# Altium PCB 48V_Converter.PcbDoc
Units mil, origin at the board's own origin, x right, y up, seen from the top; angles counter-clockwise.
Board outline 6000 x 4000 mil, 4 copper layers (Top Layer, Signal Layer 1, Signal Layer 2, Bottom Layer), stack 30.634 mil thick; 15 components, 14 nets, 64 pads, 9 vias.
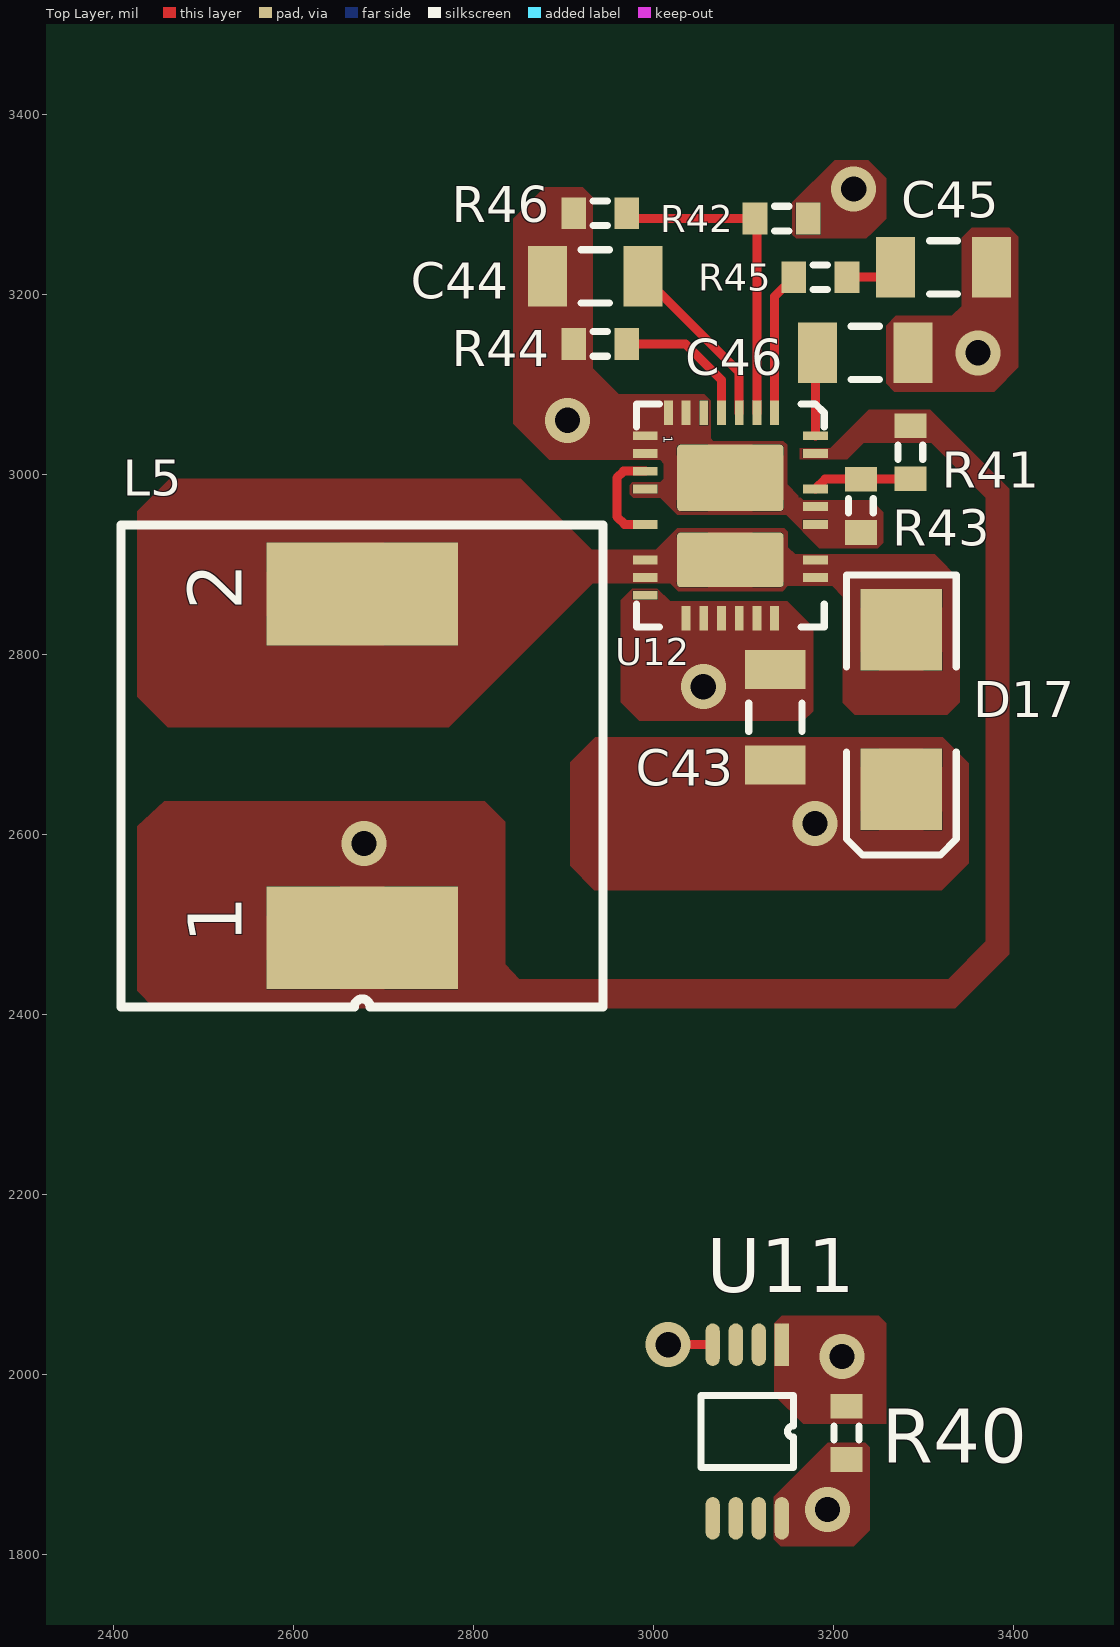
[diagram p0: Top Layer view]
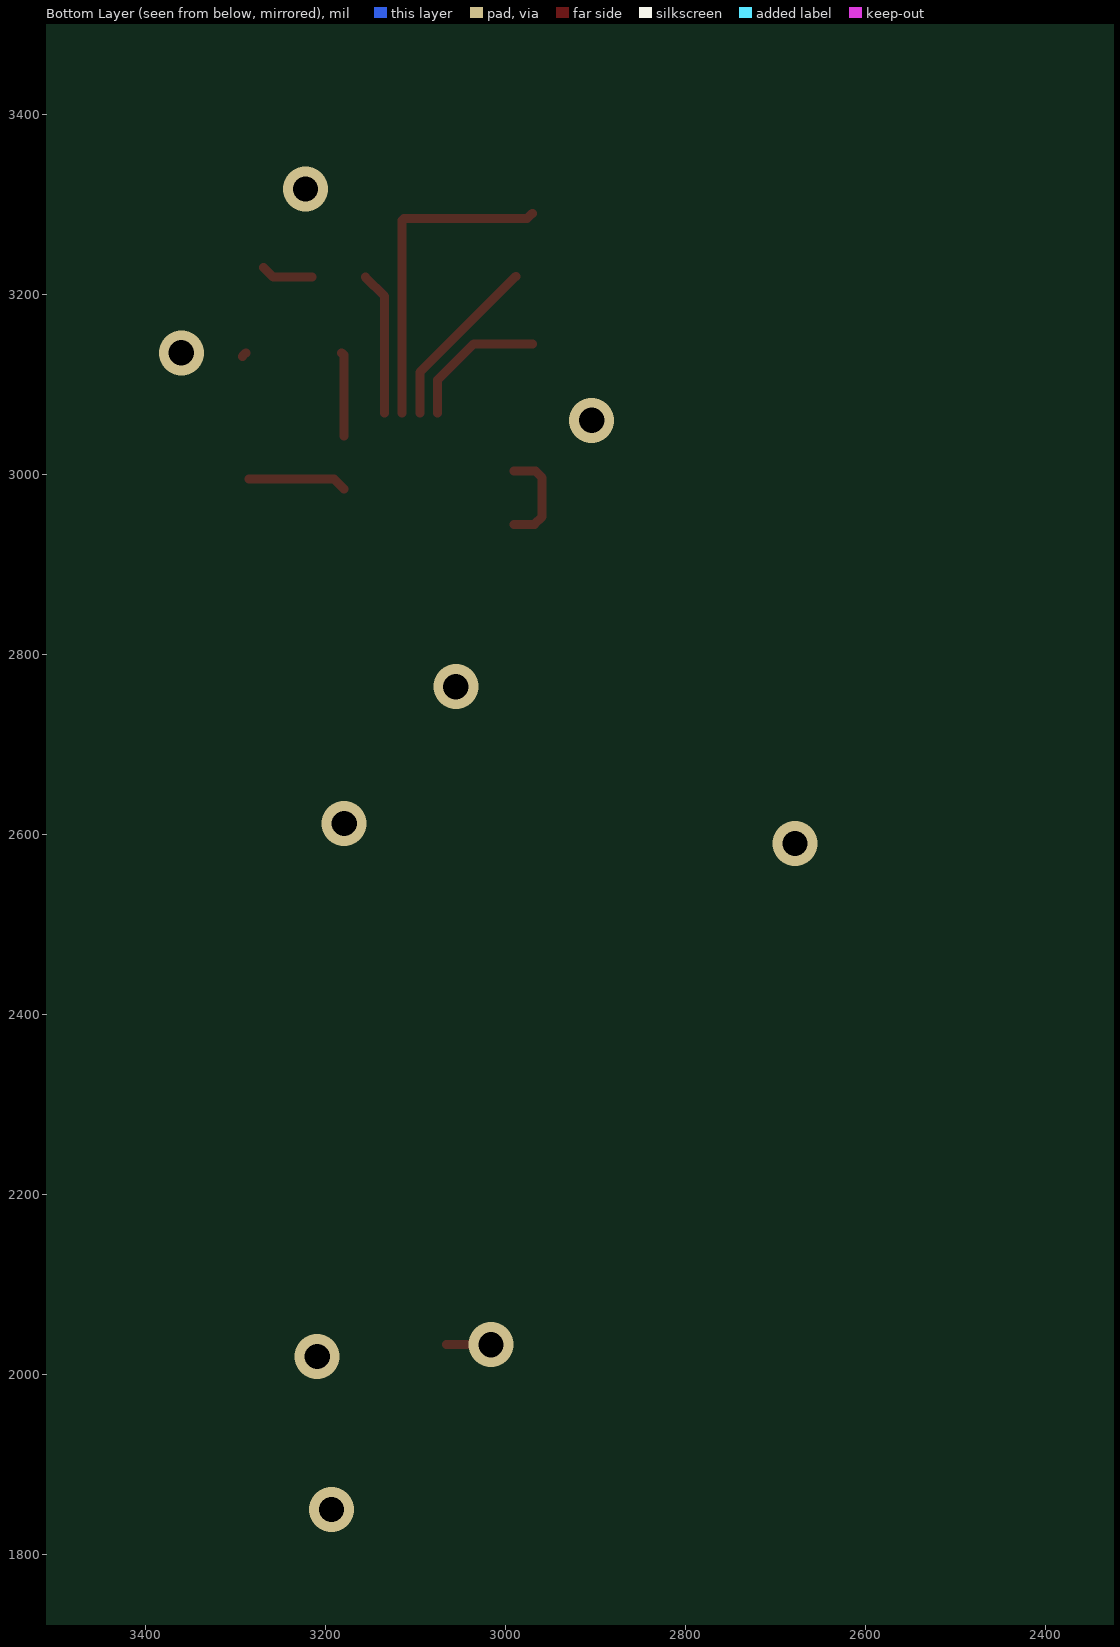
[diagram p1: Bottom Layer view, seen from below]
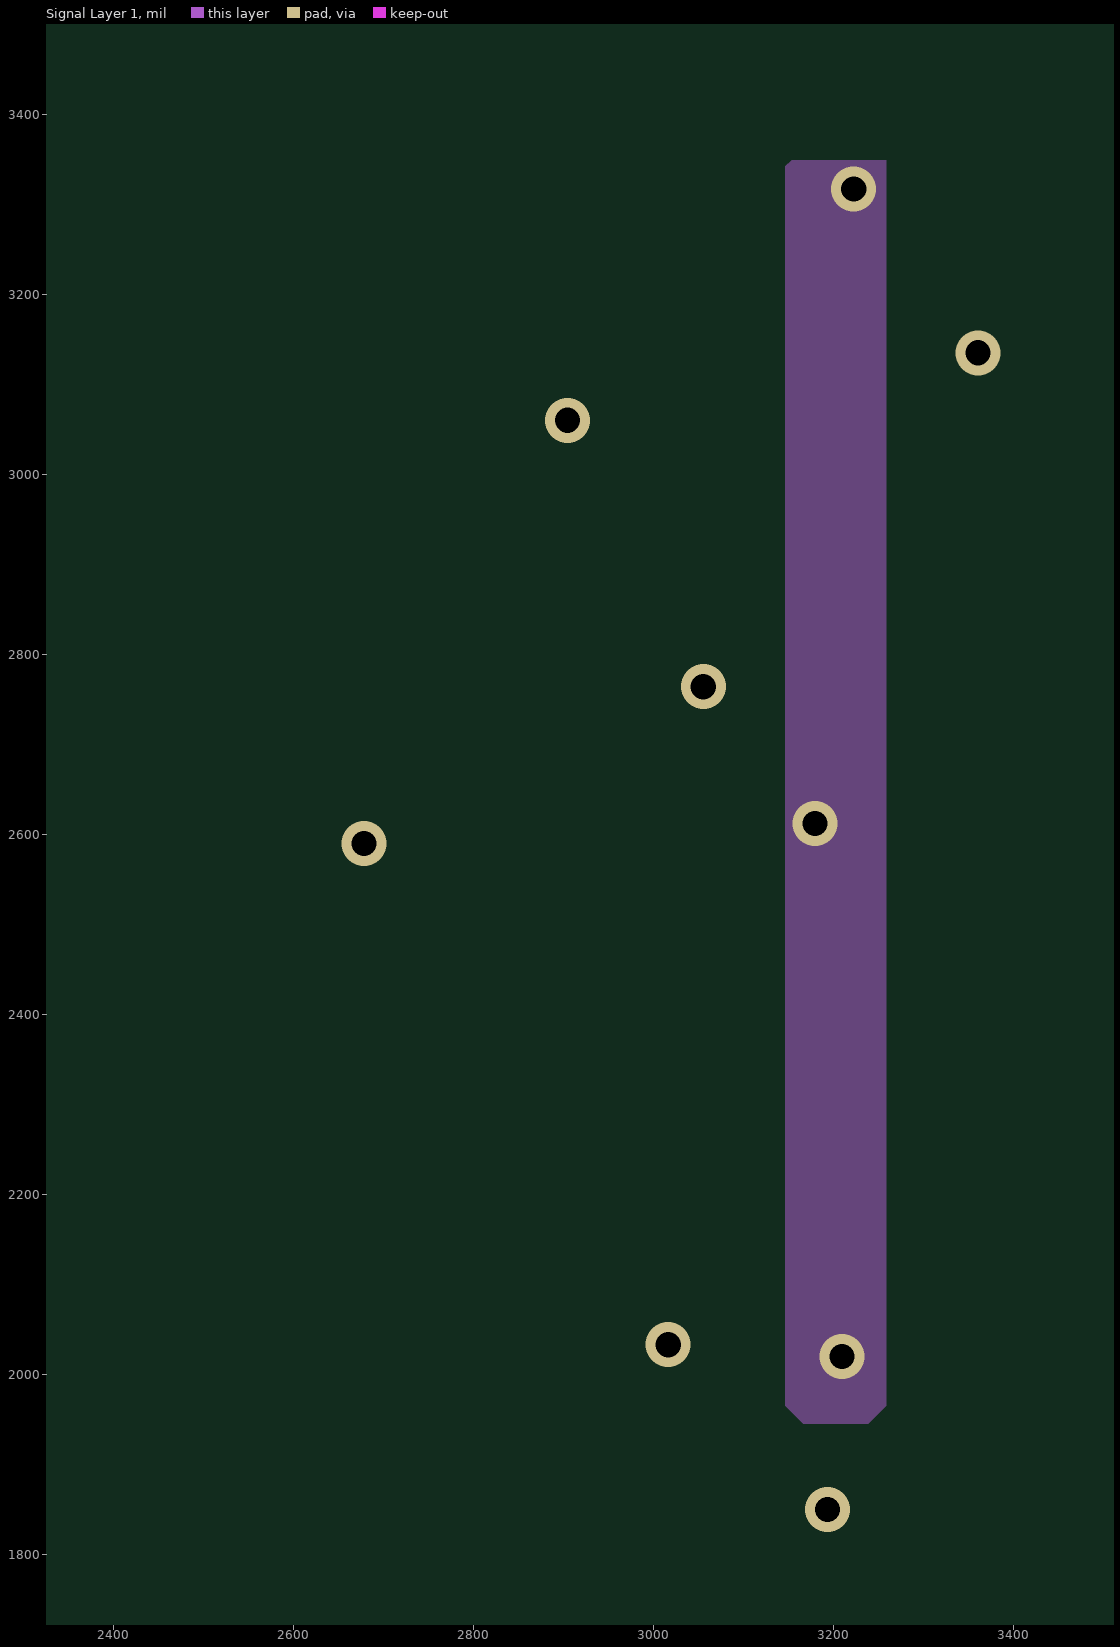
[diagram p2: Signal Layer 1]
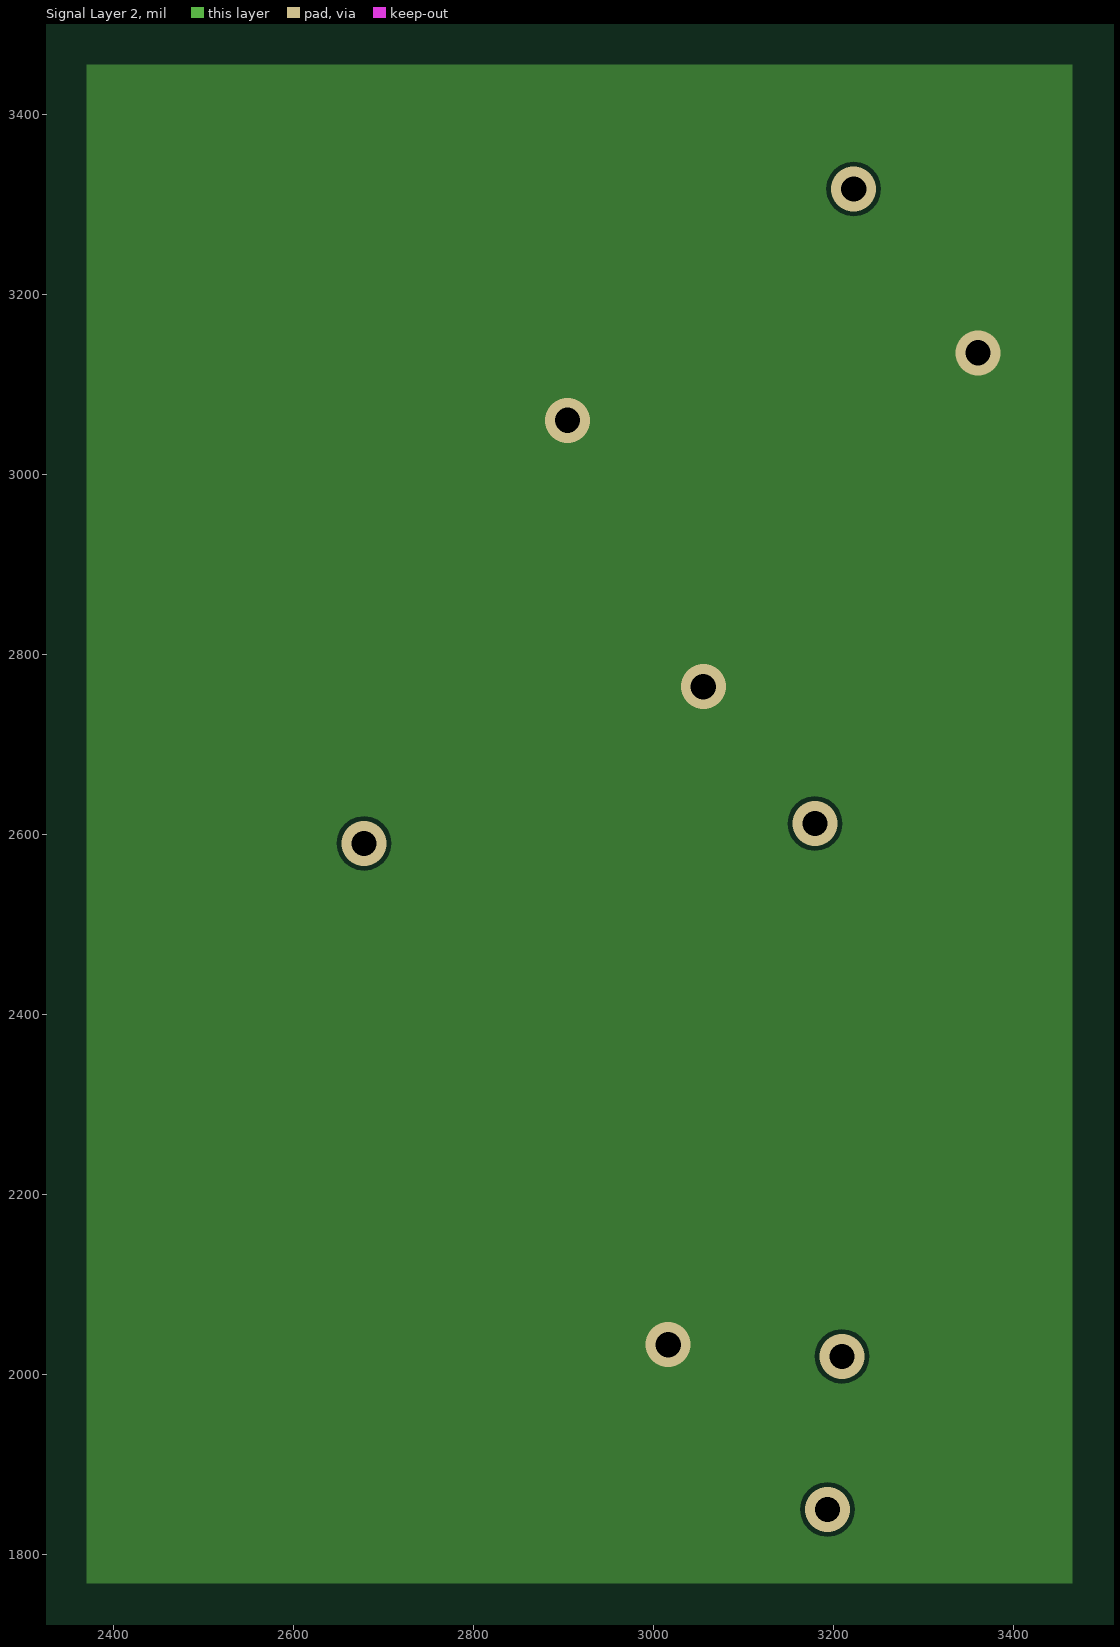
[diagram p3: Signal Layer 2]

## Layer stack, top to bottom
Top Solder: solder mask 0.4, Solder Resist, Dk 3.5
Top Layer: signal copper 1.4
Dielectric 1: core 10, FR-4, Dk 4.2
Signal Layer 1: signal copper 1.417
Dielectric 3: prepreg 5, Dk 4.2
Signal Layer 2: signal copper 1.417
Dielectric 2: core 10, Dk 4.2
Bottom Layer: signal copper 1.4
Bottom Solder: solder mask 0.4, Solder Resist, Dk 3.5

## Board outline
1000,1000 7000,1000 7000,5000 1000,5000

## Design rules (kind name [scope] priority, off if disabled: settings)
Clearance [All] p1: gap=5 ignorepadtopadclearanceinfootprint=FALSE
PlaneClearance [All] p1: clearance=0
PolygonConnect [All] p1: connectstyle=Relief reliefconductorwidth=50 reliefentries=4 polygonreliefangle="90 Angle" airgapwidth=0
RoutingVias [All] p1: holewidth=28 width=50 viastyle="Through Hole" minholewidth=28 minwidth=50 maxholewidth=28 maxwidth=50
SolderMaskExpansion [All] p1: expansion=4
Width [All] p1: maxlimit=20 minlimit=10 preferedwidth=10
29 further rules are at their usual default settings.

## Components (designator, comment, footprint, x,y, rotation, side; value= is the part's Value field where it differs from the comment)
C43 "Cap Semi" C1206 3135,2730 r270 top value=10u
C44 "Cap Semi" C1206 2935,3220 r0 top value=0.01u
C45 "Cap Semi" C1206 3321.85,3230 r180 top value=0.01u
C46 "Cap Semi" C1206 3235,3135 r180 top value=4.7u
D17 "MBRS360" SMB 3275,2738.58 r270 top
L5 "SRR1240-330MCT" SRR1240-4R7M 2676,2676 r90 top
R40 "Res3" J1-0603 3214,1935 r270 top value=10m
R41 "Res3" J1-0603 3285,3024.53 r90 top value=392k
R42 "Res3" J1-0603 3142,3284 r0 top value=464k
R43 "Res3" J1-0603 3230,2965 r90 top value=53.6k
R44 "Res3" J1-0603 2940.47,3145 r0 top value=41.2k
R45 "Res3" J1-0603 3185,3219 r180 top value=10k
R46 "Res3" J1-0603 2940.47,3290 r0 top value=15.8k
U11 "AD8217" AD8217 3142.18,2033 r270 top
U12 "LT3958EUHE#PBF" LT3958 2990.51,3042.8 r270 top

## Footprints (in the part's own frame and the unit in brackets; to place one, negate y for a bottom-side part, rotate by r counter-clockwise, add the part's x,y. Pads: shape width x height; smd on the part's side, far side on the other; paste and mask are expansions set on the pad)
AD8217 [mm]
  rect 1.2x0.4 smd: 1(0,0)
  oval 1.2x0.4 smd: 2(0,-0.65) 3(0,-1.3) 4(0,-1.95) 5(4.9,-1.95) 6(4.9,-1.3) 7(4.9,-0.65) 8(4.9,0)
  silkscreen extent 1.43,-2.28 3.47,0.33
C1206 [mm] "Chip Capacitor, Body 3.2x1.6mm, IPC High Density"
  rect 1.1x1.7 smd: 1(-1.35,0) 2(1.35,0)
  silkscreen extent -0.4,-0.75 0.4,0.75, body extent -1.7,-0.9 1.7,0.9, height 1.3
J1-0603 [mm] "Chip Resistor, Body 1.6x0.8mm, IPC High Density"
  rect 0.7x0.9 smd: 1(-0.75,0) 2(0.75,0)
  silkscreen extent -0.2,-0.35 0.2,0.35, body extent -0.85,-0.48 0.85,0.48, height 0.9
LT3958 [mm]
  rect 0.25x0.7 smd mask+0.085: 1(0,0)
  rect 0.25x0.7 smd: 2(0.5,0) 3(1,0) 4(1.5,0) 6(2.5,0) 8(3.5,0) 9(4,0) 10(4.5,0) 20(4,4.8) 21(3.5,4.8) 23(2.5,4.8) 24(2,4.8) 25(1.5,4.8) 27(0.5,4.8) 28(0,4.8)
  rect 0.7x0.25 smd: 12(5.15,1.15) 13(5.15,1.65) 14(5.15,2.15) 15(5.15,2.65) 16(5.15,3.15) 17(5.15,3.65) 30(-0.65,3.65) 31(-0.65,3.15) 32(-0.65,2.65) 33(-0.65,2.15) 34(-0.65,1.65) 35(-0.65,1.15)
  rect 0.7x0.25 smd mask+0.085: 36(-0.65,0.65)
  rrect10% 1.875x3 smd: 37(1.188,2.4)
  rrect10% 1.53x3 smd paste+0: 38(3.5,2.4)
  silkscreen extent -0.9,-0.25 5.4,5.05
SMB [mm] "DO-214-AA/SMB; 2 C-Bend Leads; Body 5.3 x 3.6 mm, inc. leads (LxW)"
  rect 2.3x2.3 smd: 1(-2.25,0) 2(2.25,0)
  silkscreen extent -3.8,-1.55 4.1,1.55
SRR1240-4R7M [mm]
  rect 2.9x5.4 smd: 1(-4.85,0) 2(4.85,0)
  silkscreen extent -6.8,-6.8 6.8,6.8

## Part data
C43 C44 C45 C46: "Capacitor (Semiconductor SIM Model)", LatestRevisionDate=29-May-2009, LatestRevisionNote="IPC-7351 Footprint Added.", PackageDescription="Chip Capacitor", PackageReference=C1206, Published=8-Jun-2000, Publisher="Altium Limited"
D17: library part "D Schottky", "Schottky Diode", Code_JEDEC=DO-214-AA, LatestRevisionDate=17-Jul-2002, LatestRevisionNote="Re-released for DXP Platform.", PackageDescription="DO-214-AA/SMB; 2 C-Bend Leads; Body 5.3 x 3.6 mm, inc. leads (LxW)", PackageReference=SMB, Published=8-Jun-2000, Publisher="Altium Limited"
L5: library part SRR1240-4R7MCT, "Inductor"
R40 R41 R42 R43 R44 R45 R46: "Resistor", LatestRevisionDate=29-May-2009, LatestRevisionNote="IPC-7351 Footprint Added.", PackageDescription="Chip Resistor", PackageReference=J1-0603, Published=8-Jun-2000, Publisher="Altium Limited"
U11: "Current Shunt Moniter"
U12: "LT3958", Frequency Adjust Range="100kHz - 1MHz", Manufacturer="Linear Technology", Supplier Part Number 1=LT3958EUHE#PBF-ND, ComponentLink1Description="Manufacturer URL", ComponentLink1URL=http://www.linear.com/, ComponentLink2Description=Datasheet, ComponentLink2URL=http://cds.linear.com/docs/en/datasheet/3958f.pdf, ComponentLink3Description="Package Specification", ComponentLink3URL=http://cds.linear.com/docs/en/packaging/QFN_28_05-08-1836.pdf, Mounting Technology="Surface Mount", Number of Outputs=1, PackageDescription="28-Pin Plastic QFN, Body 5 x 6 mm, Pitch 0.5 mm", PackageReference=UHE-36, PackageVersion="Rev. D, 02/2012", PartNumber=LT3958EUHE#PBF, RoHS=TRUE, Supplier 1=Digi-Key, Supplier 2=Farnell, Supplier 3=Newark, Supplier Part Number 2=2294964, Supplier Part Number 3=78R9566

## Via types
v1: diameter 50, hole 28, Top Layer to Bottom Layer, 9 vias

## Nets (pads, with @x,y where several pads share a name; then routed paths per layer and width w, separated by ;. In a path a pad name is that pad's centre, name@x,y a point inside that pad or via, vN(x,y) a via of type N, cw(c..) or ccw(c..) an arc to the next point about the centre after c; other vN are vias at no path point)
GND: C43.1 C44.1 C45.1 C46.1 R43.1 R44.1 R46.1 U11.4 U12.1 U12.2 U12.4 U12.10 U12.12 U12.13 U12.14 U12.15 U12.16 U12.17 U12.23 U12.24 U12.34 U12.35 U12.36 U12.37 | length 55.1
  Top Layer w10: v1(3016,2033) U11.4 ; C46.1 C46.1@3292.15,3131
  other v1: 3055,2764 2904,3060 3360,3135
NetC43_2: C43.2 D17.2 R40.1 R42.2 U11.1
  other v1: 3209,2020 3179,2612 3222,3317
NetC44_2: C44.2 U12.32 | length 195.8
  Top Layer w10: C44.2 3094.84,3113.31 U12.32
NetC45_2: C45.2 R45.1 | length 58.7
  Top Layer w10: R45.1 3257.7,3219 C45.2
NetC46_2: C46.2 U12.28 | length 93.2
  Top Layer w10: U12.28 3179.49,3132.64 C46.2
NetD17_1: D17.1 L5.2 U12.8 U12.9 U12.20 U12.21 U12.38
NetL5_1: L5.1 R41.2 U12.27
  other v1: 2678,2590
NetR40_2: R40.2 U11.8
  other v1: 3193,1850
NetR41_1: R41.1 R43.2 U12.25 | length 110.2
  Top Layer w10: U12.25 3190.28,2994.53 R43.2 3284.53,2994.53 R41.1
NetR42_1: R42.1 R46.2 U12.31 | length 361.4
  Top Layer w10: R46.2 2976,3284 R42.1 3114.53,3281.95 U12.31
NetR44_2: R44.2 U12.33 | length 158.2
  Top Layer w10: R44.2 3035,3145 3075.16,3104.84 U12.33
NetR45_2: R45.2 U12.30 | length 159.4
  Top Layer w10: U12.30 3134.21,3197.74 R45.2
NetU11_5: U11.5
NetU12_3: U12.3 U12.6 | length 112.7
  Top Layer w10: U12.6 2967.63,2944.37 2959,2953 2959,2996 2966.43,3003.43 U12.3
pads on no net: U11.2 U11.3 U11.6 U11.7

## Polygon pours and split planes (outlines as drawn)
NetC43_2 on Top Layer "Signal Layer 1-NetC43_2-3" (solid, pour order 24): 3258,1945 3166,1945 3134,1977 3134,2057 3142,2065 3250,2065 3258,2057
NetR40_2 on Top Layer "Top Layer-NetR40_2" (solid, pour order 38): 3133,1864 3193,1924 3235,1924 3240,1919 3240,1827 3222,1809 3141,1809 3133,1817
NetC43_2 on Top Layer "Top Layer-NetC43_2-1" (solid, pour order 36): 3158,3262 3154,3266 3154,3302 3201,3349 3238,3349 3258,3329 3258,3284 3236,3262
GND on Top Layer "Top Layer-GND3" (solid, pour order 34): 3258,3165 3269,3176 3331,3176 3342,3187 3342,3263 3353,3274 3395,3274 3405,3264 3405,3119 3378,3092 3267,3092 3258,3101
GND on Top Layer "Top Layer-GND2" (solid, pour order 32): 2844,3284 2879,3319 2921,3319 2932,3308 2932,3118 2961,3089 3056,3089 3063,3082 3063,3040 3066,3037 3144,3037 3148,3033 3148,2989 3166,2971 3242,2971 3255,2958 3255,2924 3249,2918 3184,2918 3147,2955 3026,2955 3007,2974 2977,2974 2973,2978 2973,2988 2976,2991 3007,2991 3011,2995 3011,3012 3007,3016 2884,3016 2844,3056
GND on Top Layer "Top Layer-GND1" (solid, pour order 30): 2976,2873 3004,2873 3018,2859 3148,2859 3177,2830 3177,2737 3166,2726 2984,2726 2963,2747 2963,2860
NetC43_2 on Top Layer "Signal Layer 1-NetC43_2-3" (solid, pour order 28): 2907,2680 2935,2708 3321,2708 3350,2679 3350,2568 3320,2538 2934,2538 2907,2565
NetD17_1 on Top Layer "Top Layer-NetD17_1" (solid, pour order 12): 2426,2959 2462,2995 2852,2995 2931,2916 3002,2916 3026,2940 3145,2940 3149,2936 3149,2919 3157,2911 3312,2911 3340,2883 3340,2747 3326,2733 3223,2733 3210,2746 3210,2864 3198,2876 3149,2876 3143,2870 3027,2870 3018,2879 2932,2879 2772,2719 2460,2719 2426,2753
NetL5_1 on Top Layer "Top Layer-NetL5_1" (solid, pour order 18): 2445,2407 2426,2426 2426,2609.25 2456.27,2637 2812,2637 2835,2614 2835,2455.8 2850.27,2439 3327,2439 3369,2481 3369,2974 3308,3035 3233,3035 3215,3017 3162,3017 3162,3029 3196,3029 3239,3072 3307,3072 3395,2984 3395,2467 3335,2407
GND on Signal Layer 2 "Signal Layer 2-GND" (solid, pour order 0): 2370,1768 2370,3455 3465,3455 3465,1768
NetC43_2 on Signal Layer 1 "Signal Layer 1-NetC43_2" (solid, pour order 22): 3258,3349 3258,1965 3238,1945 3166,1945 3146,1965 3146,3342 3153,3349

## Text inside footprints (layer, text, board x,y; h text height)
L5: Top Overlay "1" at 2542.14,2479.15 h60 r90; Top Overlay "1" at 2542.14,2479.15 h60 r90; Top Overlay "2" at 2542.14,2849.23 h60 r90
U12: Top Overlay "1" at 3011.18,3042.8 h9.84 r270